# EAGLE board 8ModuleBoard (EAGLE 6.5.0)

Size 100 x 80 mm. Coordinates in mm from the lower left corner, seen from the top.
Outline: 0,0 100,0 100,80 0,80 0,0
Copper layers (1*16): Top 0.035mm / dielectric 1.5mm / Bottom 0.035mm
Design rules "default": minimum track width 10mil, minimum drill 24mil, track to track 8mil, track to pad 8mil, pad to pad 8mil, via to via 8mil, smd to smd 8mil, copper to edge 40mil, drill to drill 8mil, minimum pad ring 10mil, minimum via ring 8mil, stop-mask expansion 4mil, vias tented up to drill 0mil, thermal gap 10mil

## Footprints (pad centres in the part's own frame; a part is rotated, then mirrored left to right if it is on the bottom)
E5-8,5 = drill 1.016 pad 2.54: + -2.54,0 | drill 1.016 pad 2.54 octagon: - 2.54,0
1206 = smd 1.6 x 1.8: 1 -1.4,0; 2 1.4,0
EIA3216 = smd 1.4 x 1.6: A 1.4,0; C -1.4,0
SMBJ = smd 1.78 x 2.16: A 2.04,0; C -2.03,0
MF-5,1B = drill 0.914 pad 2.184 octagon: 1 -2.54,0; 2 2.54,0
SOT223 = smd 1.219 x 2.235: 1 -2.311,-3.099; 2 0,-3.099; 3 2.311,-3.099 | smd 3.6 x 2.2: 4 0,3.099
1206' = smd 1.6 x 1.803: A -1.422,0; C 1.422,0
S05K300 = drill 0.914 pad 1.778 long: 1 -1.524,-2.54; 2 1.524,2.54
HM-11 = smd 1.778 x 0.914: GND 7.508,-0.6; NC1 -5.808,-0.6; NC2 -5.808,-2.1; NC3 7.508,-3.6; NV1 -5.808,-3.6; NV2 -5.808,-5.1; PIO0 7.508,5.4; PIO1 7.508,3.9; PIO2 7.508,2.4; PIO3 7.508,0.9; RESETB 7.508,-2.1; UART_CTS -5.808,2.4; UART_RTS -5.808,5.4; UART_RX -5.808,0.9; UART_TX -5.808,3.9; VCC 7.508,-5.1
MKS1854-6-0-404 = drill 1.2 pad 3.81: 1 5.25,47; 2 23.75,47; 3 12.25,10; 4 19.75,10
AK300/2 = drill 1.321 pad 2.7 long: 1 -2.515,0; 2 2.489,0

## Placement (x,y rotation side)
C1  [E5-8,5]  -49.53,55.88 0 top  (outside the outline)
C2  [E5-8,5]  -80.01,-11.43 0 top  (outside the outline)
C3  1.0uF  [1206]  -82.55,-24.13 0 top  (outside the outline)
C4  10uF  [EIA3216]  -90.17,-35.56 0 top  (outside the outline)
C5  10uF  [EIA3216]  -90.17,-39.37 0 top  (outside the outline)
D1  [SMBJ]  -81.28,-20.32 0 top  (outside the outline)
F1  [MF-5,1B]  -27.94,71.12 0 top  (outside the outline)
IC1  [SOT223]  -90.17,-27.94 0 top  (outside the outline)
LED1  [1206']  -82.55,-31.75 0 top  (outside the outline)
LED2  [1206']  -90.17,-49.53 0 top  (outside the outline)
R1  S05K300  [S05K300]  -58.42,55.88 0 top  (outside the outline)
R2  [1206]  -82.55,-29.21 0 top  (outside the outline)
R3  [1206]  -90.17,-41.91 0 top  (outside the outline)
R4  [1206]  -90.17,-44.45 0 top  (outside the outline)
R5  [1206]  -90.17,-46.99 0 top  (outside the outline)
U$1  HM-11  [HM-11]  -78.74,0 0 top  (outside the outline)
X1  MKS1854-6-0-404  [MKS1854-6-0-404]  -45.72,1.27 0 top  (outside the outline)
X2  [AK300/2]  -39.37,58.42 0 top  (outside the outline)

## Library data of the parts
C1 C2 = rcl
C3 = SparkFun-Capacitors; PROD_ID: CAP-09822
C4 C5 = SparkFun-Capacitors; PROD_ID: CAP-00811
D1 = diode
F1 = bourns
IC1 = SparkFun-PowerIC; PROD_ID: VREG-08170
LED1 LED2 = led
R1 = varistor
R2 = SparkFun-Resistors
R3-R5 = SparkFun-Passives
U$1 = HM-11
X1 = Morsun-con-stocko; OC_FARNELL: 1141862; OC_NEWARK: unknown
X2 = con-ptr500; OC_FARNELL: unknown; OC_NEWARK: unknown

## Nets
+3V3: C5.A IC1.2 IC1.4
+5V: C1.+ C2.+ C3.1 C4.A D1.C IC1.3 R2.1 X1.3
GND: C1.- C2.- C3.2 C4.C C5.C D1.A IC1.1 LED1.C LED2.C X1.4
N$1: F1.1 X2.1
N$2: R1.1 X1.2 X2.2
N$3: F1.2 R1.2 X1.1
N$4: U$1.UART_RTS
N$5: R3.2 U$1.UART_TX
N$8: U$1.UART_CTS
N$9: R4.2 U$1.UART_RX
N$12: R5.1
N$14: LED2.A R5.2
N$15: LED1.A R2.2

## Tracks (layer width: path | path; a pad name or v marks a point on that pad's centre or on a via)
+3V3  (2 unrouted)
+5V  (7 unrouted)
GND  (9 unrouted)
N$1  (1 unrouted)
N$2  (2 unrouted)
N$3  (2 unrouted)
N$5  (1 unrouted)
N$9  (1 unrouted)
N$14  (1 unrouted)
N$15  (1 unrouted)